# Altium PCB CompuertasNOT_Pcb.PcbDoc
Units mm, origin at the board's own origin, x right, y up, seen from the top; angles counter-clockwise.
Board outline 35.97 x 36.2 mm, 2 copper layers (Top Layer, Bottom Layer); 14 components, 10 nets, 43 pads, 0 vias.
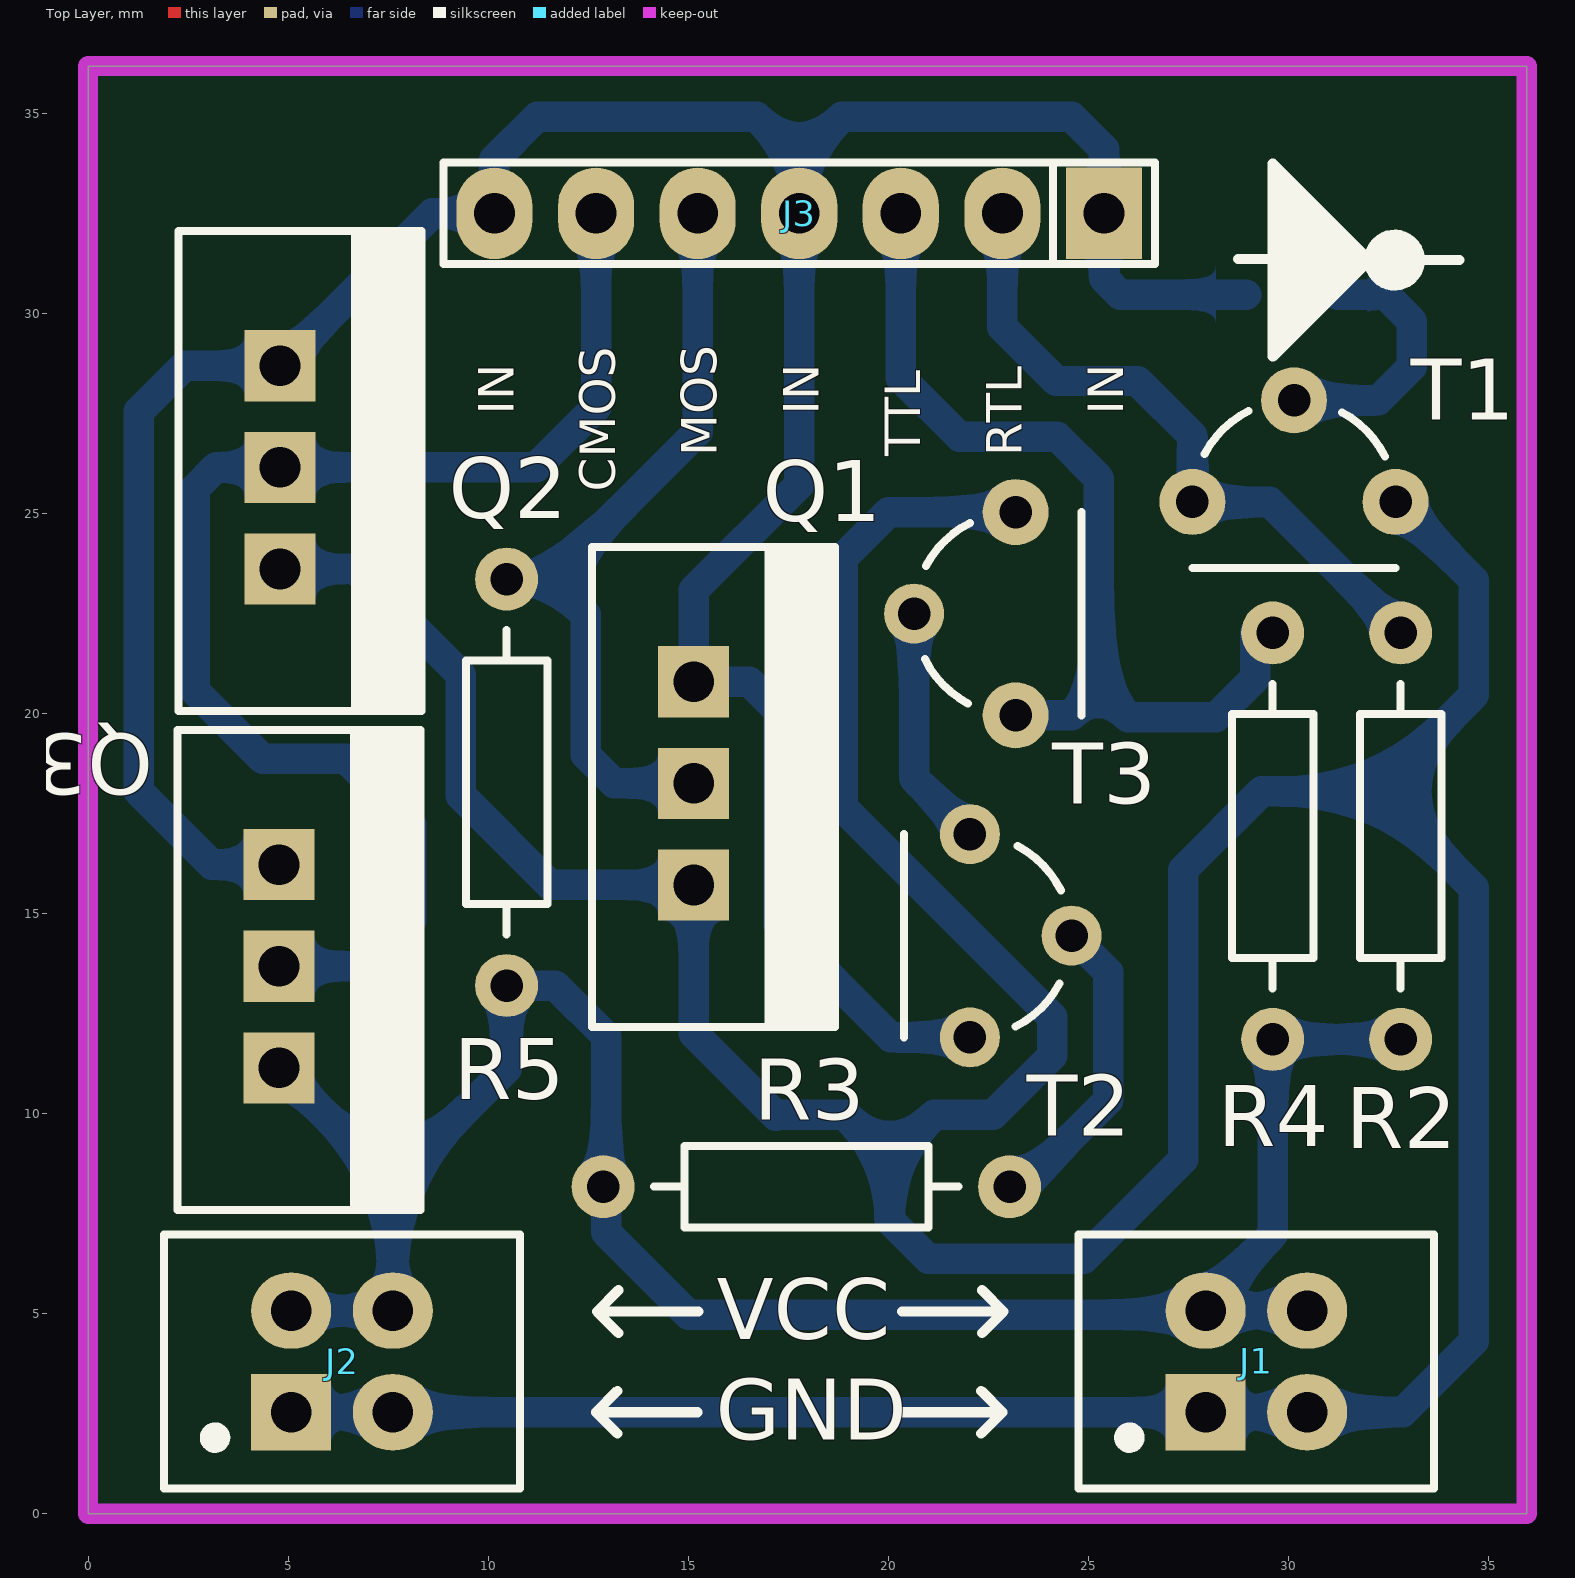
[diagram p0: Top Layer view]
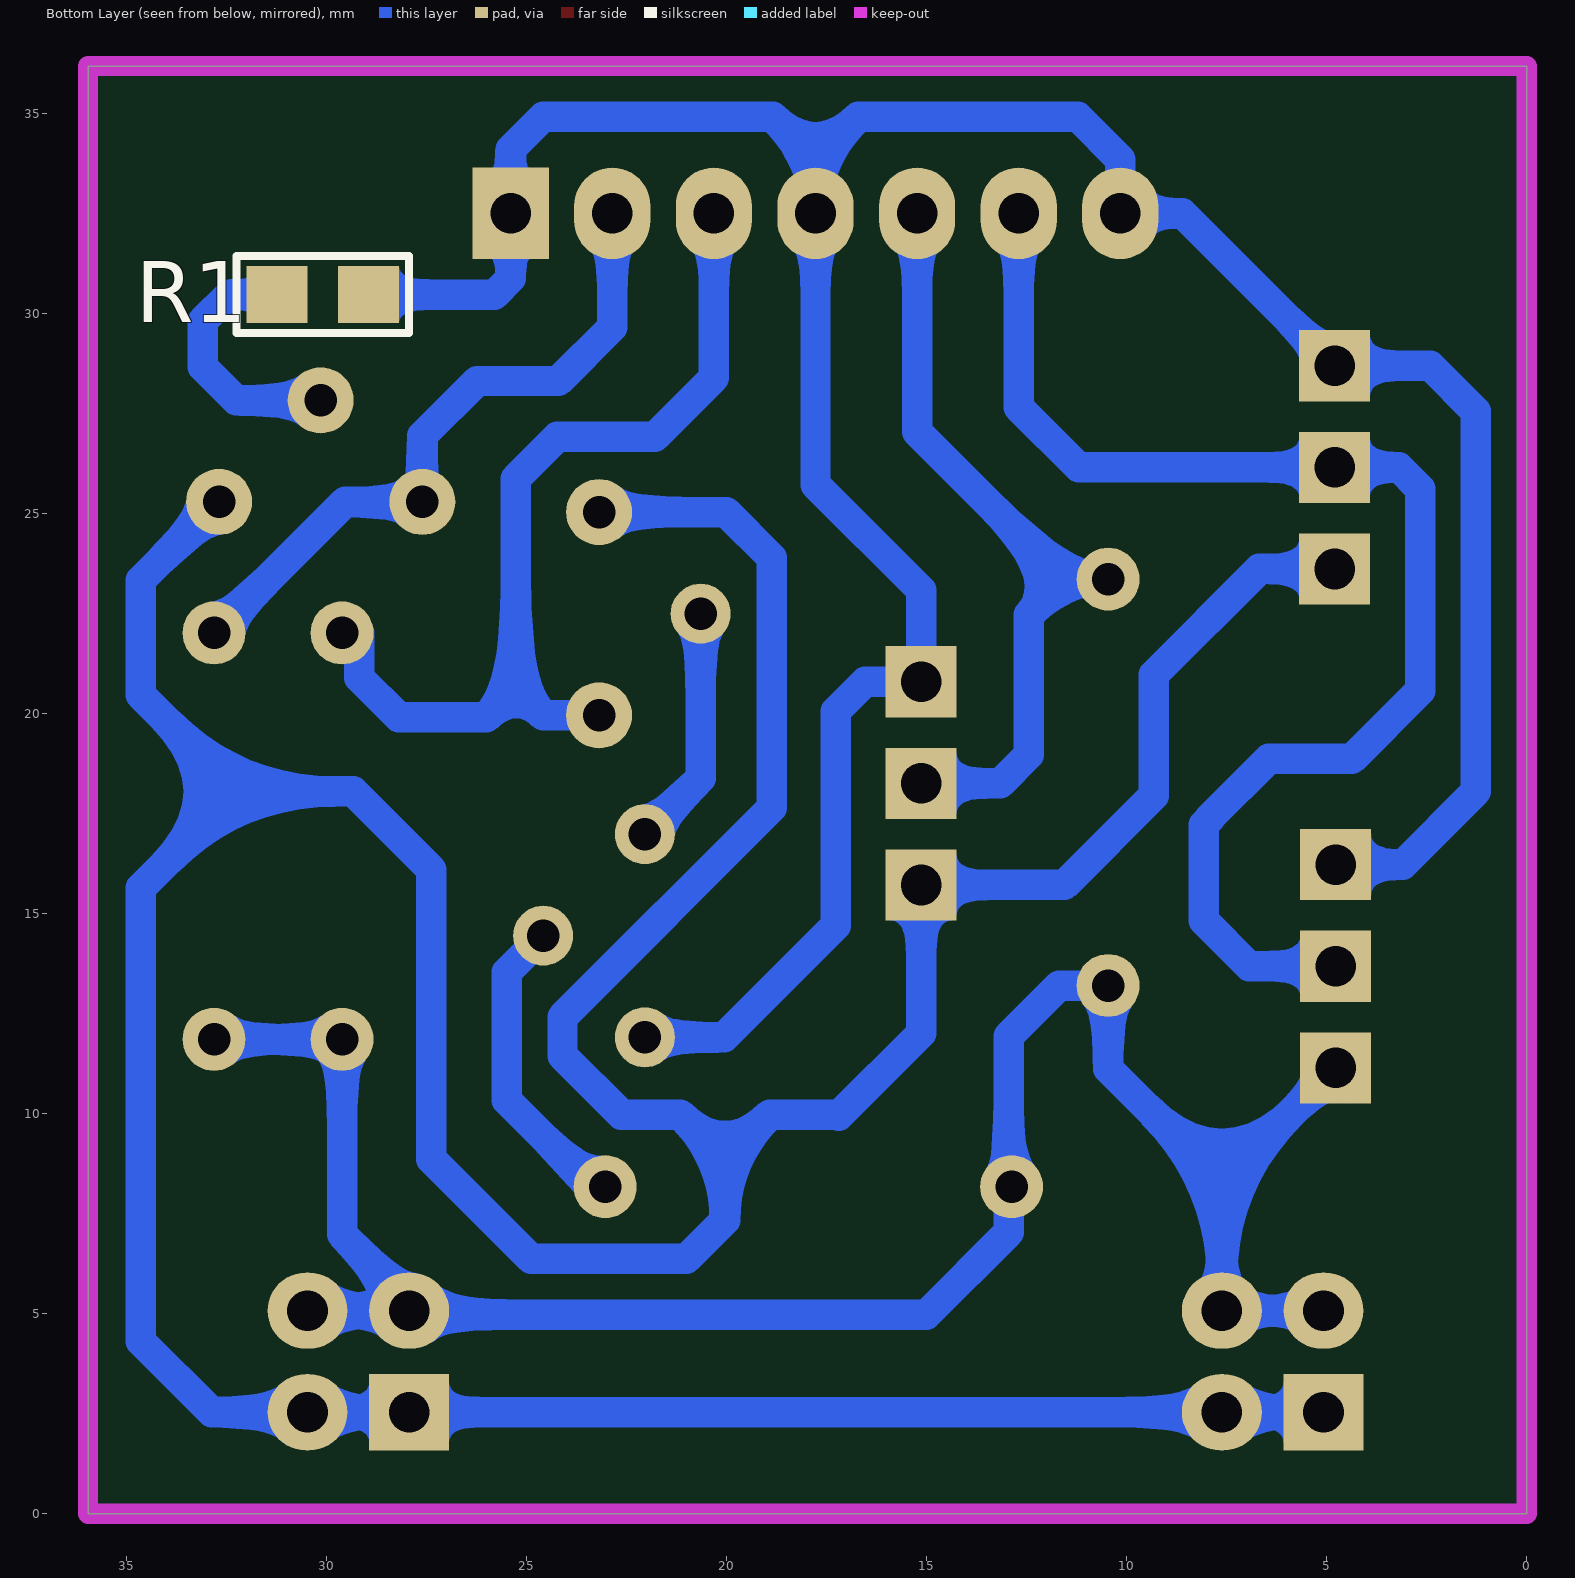
[diagram p1: Bottom Layer view, seen from below]
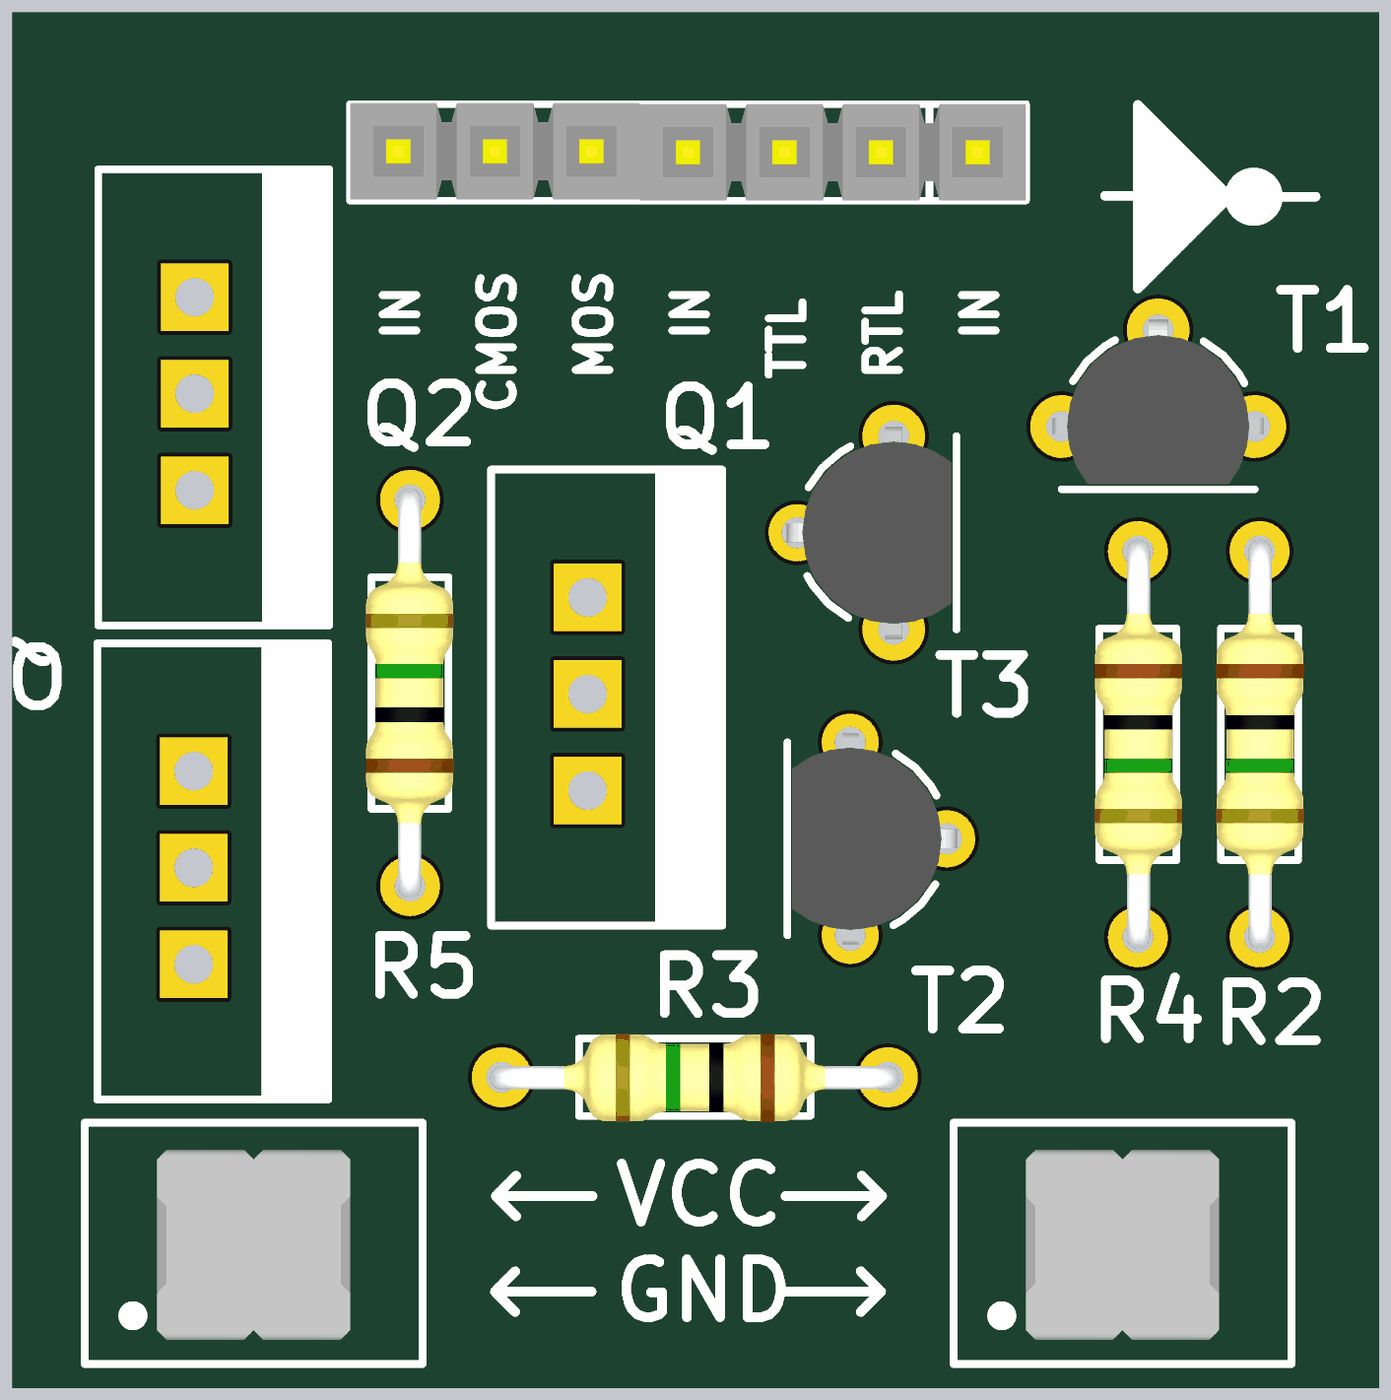
[diagram p2: 3D render of the assembled board from above, using the file's embedded part models]

## Layer stack, top to bottom
Top Solder: solder mask 0.0102, Solder Resist, Dk 3.5
Top Layer: signal copper 0.0356
Dielectric 1: dielectric 0.32, FR-4, Dk 4.8
Bottom Layer: signal copper 0.0356
Bottom Solder: solder mask 0.0102, Solder Resist, Dk 3.5

## Board outline
0,0 0,36.195 35.966,36.195 35.966,0

## Design rules (kind name [scope] priority, off if disabled: settings)
Clearance [All] p1: gap=0.635
PolygonConnect [All] p1: connectstyle=Relief reliefconductorwidth=0.254 reliefentries=4 polygonreliefangle="90 Angle" airgapwidth=0.254
RoutingVias [All] p1: holewidth=0.711 width=1.27 viastyle="Through Hole" minholewidth=0.711 minwidth=1.27 maxholewidth=0.711 maxwidth=1.27
SolderMaskExpansion [All] p1: expansion=0.102
Width [All] p1: maxlimit=0.889 minlimit=0.635 preferedwidth=0.762
30 further rules are at their usual default settings.

## Components (designator, comment, footprint, x,y, rotation, side; value= is the part's Value field where it differs from the comment)
J1 "Supply Header" SIP2*2 27.94,2.54 r0 top
J2 "Supply Header" SIP2*2 5.08,2.54 r0 top
J3 "CON7" SIP7 25.4,32.512 r180 top
Q1 "IRFZ44N" "TO-220 V" 15.138,18.263 r270 top
Q2 "IRFZ44N" "TO-220 V" 4.801,26.162 r270 top
Q3 "IRF9530" "TO-220 V" 4.775,13.691 r270 top
R1 "470k" 0805 30.099,30.48 r180 bottom
R2 "10k" RES400 32.817,22.022 r270 top
R3 "470k" RES400 23.038,8.179 r180 top
R4 "10k" RES400 29.616,22.022 r270 top
R5 "10k" RES400 10.465,13.208 r90 top
T1 "BC547" TO92#1 30.15,26.568 r180 top
T2 "BC547" TO92#2 23.317,14.453 r90 top
T3 "BC547" TO92#3 21.92,22.504 r270 top

## Footprints (in the part's own frame and the unit in brackets; to place one, negate y for a bottom-side part, rotate by r counter-clockwise, add the part's x,y. Pads: shape width x height; smd on the part's side, far side on the other; paste and mask are expansions set on the pad)
0805 [mil] "Pasivo 0805"
  rect 60x56 smd: 1(-45,0) 2(45,0)
  silkscreen extent -85,-38 85,38, body extent -39,-25 39,25, height 15
RES400 [mil]
  round 62 hole 32: 1(0,0) 2(400,0)
  silkscreen extent 50,-40 350,40, body extent -12,-45 412,46, height 96
SIP2*2 [mm]
  rect 2x1.905 hole 1.016: 1(0,0)
  oval 2x1.905 hole 1.016: 2(0,2.54) 3(2.54,0) 4(2.54,2.54)
  silkscreen extent -3.17,-1.91 5.71,4.44, body extent -1.27,-1.27 3.81,3.73, height 8.8
SIP7 [mil]
  rect 75x90 hole 40: 1(0,0)
  oval 75x90 hole 40: 2(100,0) 3(200,0) 4(300,0) 5(400,0) 6(500,0) 7(600,0)
  silkscreen extent -50,-50 650,50, body extent -50,-51 650,50, height 330
TO92#1 [mm]
  round 1.65 hole 0.813: 1(0,-1.27) 2(2.54,1.27) 3(-2.54,1.27)
  silkscreen extent -2.54,-1 2.54,2.92, body extent -2.79,-1.55 2.79,2.79, height 8
TO92#2 [mm]
  round 1.5 hole 0.813: 1(0,-1.27) 2(2.54,1.27) 3(-2.54,1.27)
  silkscreen extent -2.54,-1 2.54,2.92, body extent -2.79,-1.55 2.79,2.79, height 8
TO92#3 [mm]
  round 1.5 hole 0.813: 1(0,-1.27)
  round 1.65 hole 0.813: 2(2.54,1.27) 3(-2.54,1.27)
  silkscreen extent -2.54,-1 2.54,2.92, body extent -2.79,-1.55 2.79,2.79, height 8
"TO-220 V" [mil]
  rect 70x70 hole 40: 1(-100,0) 2(0,0) 3(100,0)
  silkscreen extent -232,-100 240,139, body extent -197,-79 197,118, height 709

## Part data
J1 J2: library part CON2*2
Q1 Q2: library part "MOSFET N"
Q3: library part "MOSFET P"
R1 R2 R3 R4 R5: library part RES
T1 T2 T3: library part "TRANSISTOR NPN"

## Nets (pads, with @x,y where several pads share a name; then routed paths per layer and width w, separated by ;. In a path a pad name is that pad's centre, name@x,y a point inside that pad or via, vN(x,y) a via of type N, cw(c..) or ccw(c..) an arc to the next point about the centre after c; other vN are vias at no path point)
CMOS_OUT: J3.6 Q2.2 Q3.2 | length 33.8
  Bottom Layer w0.762: Q3.2 6.934,13.691 8.077,14.834 8.077,17.227 7.925,17.379 7.925,17.399 6.452,18.872 4.369,18.872 2.667,20.574 2.667,25.629 3.2,26.162 Q2.2 11.201,26.162 12.7,27.661 J3.6
GND: J1.1 J1.3 J2.1 J2.3 Q1.3 Q2.3 T1.3 T3.3 | length 127.1
  Bottom Layer w0.762: Q2.3 6.68,23.622 9.322,20.98 9.322,17.958 11.557,15.723 Q1.3 15.138,12.014 17.196,9.957 17.221,9.982 18.923,9.982 20.041,8.865 ; J2.1 J2.3 J1.1 J1.3 32.868,2.54 34.646,4.318 34.646,15.646 32.233,18.059 ; T3.3 20.015,25.044 18.872,23.901 18.872,17.653 24.105,12.421 24.105,11.456 22.631,9.982 21.158,9.982 20.041,8.865 ; T1.3 34.646,23.343 34.646,20.472 32.233,18.059 ; 20.041,8.865 20.041,7.341 21.006,6.375 24.892,6.375 27.381,8.865 27.381,16.104 29.337,18.059 32.233,18.059
IN: J3.1 J3.4 J3.7 Q1.1 Q2.1 Q3.1 R1.2 T2.3 | length 77.8
  Bottom Layer w0.762: Q3.1 3.099,16.231 1.27,18.059 1.27,27.559 2.413,28.702 Q2.1 8.611,32.512 J3.7 10.16,33.858 11.227,34.925 16.713,34.925 17.78,33.858 ; T2.3 20.066,11.913 17.272,14.707 17.272,20.066 16.535,20.803 Q1.1 15.138,23.089 17.78,25.73 J3.4 17.78,33.858 ; R1.2 25.806,30.48 25.4,30.886 J3.1 25.4,34.112 24.587,34.925 18.847,34.925 17.78,33.858
MOS_OUT: J3.5 Q1.2 R5.2 | length 19.5
  Bottom Layer w0.762: R5.2 11.557,23.368 ; Q1.2 13.157,18.263 12.446,18.974 12.446,22.479 11.557,23.368 ; J3.5 15.24,27.051 11.557,23.368
NetR1_1: R1.1 T1.1 | length 6.6
  Bottom Layer w0.762: T1.1 32.258,27.838 33.096,28.677 33.096,29.82 32.436,30.48 R1.1
NetR3_1: R3.1 T2.1 | length 7.4
  Bottom Layer w0.762: R3.1@23.47,8.306 25.502,10.338 25.502,13.538 T2.1
NetT2_2: T2.2 T3.1 | length 6.1
  Bottom Layer w0.762: T3.1 20.65,18.39 T2.2
RTL_OUT: J3.2 R2.1 T1.2 | length 16.9
  Bottom Layer w0.762: J3.2 22.86,29.667 24.206,28.321 26.238,28.321 27.61,26.949 T1.2 29.54,25.298 R2.1
TTL_OUT: J3.3 R4.1 T3.2 | length 23.5
  Bottom Layer w0.762: J3.3 20.32,28.397 21.793,26.924 24.232,26.924 25.273,25.883 25.273,20.65 ; T3.2 24.587,19.964 25.273,20.65 ; R4.1@29.185,22.022 29.185,20.904 28.194,19.914 26.01,19.914 25.273,20.65
VCC: J1.2 J1.4 J2.2 J2.4 Q3.3 R2.2 R3.2 R4.2 R5.1 | length 53.1
  Bottom Layer w0.762: Q3.3@4.75,11.379 4.75,11.151 7.62,8.28 ; J2.2 J2.4 7.62,8.28 ; J1.4 J1.2 ; R2.2 R4.2 29.616,6.985 27.991,5.359 27.991,5.131 J1.2 ; 7.62,8.28 10.465,11.125 R5.1 11.684,13.208 12.954,11.938 12.954,7.036 15.011,4.978 27.838,4.978 J1.2

## Keep-outs
Keep-Out Layer:
  the board outline again, w0.508

## Silkscreen, mask and mechanical layers (free items; w line width, h text height)
Top Overlay:
  circle w0.254: c32.664,31.344 r0.381
  circle w0.254: c32.664,31.344 r0.254
  circle w0.254: c32.664,31.344 r0.457
  circle w0.254: c32.664,31.344 r0.635
  circle w0.254: c32.664,31.344 r0.127
  region: 29.616,28.931 32.029,31.344 29.616,33.757
  lines w0.254: 12.776,2.54 12.7,2.54 ; 12.802,5.055 12.725,5.055 ; 13.233,2.007 12.7,2.54 ; 13.259,4.521 12.725,5.055 ; 15.24,2.54 12.7,2.54 ; 15.265,5.055 12.725,5.055 ; 20.32,2.54 22.86,2.54 ; 20.345,5.055 22.885,5.055 ; 22.327,2.007 22.86,2.54 ; 22.327,3.073 22.86,2.54 ; 22.352,4.521 22.885,5.055 ; 22.352,5.588 22.885,5.055 ; 28.753,31.369 29.616,31.369 ; 32.791,31.344 34.29,31.344 ; 12.7,2.54 13.233,3.073 12.7,2.54 ; 12.725,5.055 13.259,5.588 12.725,5.055 ; 29.616,28.931 32.029,31.344 29.616,33.757 29.616,33.249 29.616,28.931
  text "IN" at 10.643,27.48 h0.89 r90
  text "IN" at 18.263,27.48 h0.89 r90
  text "IN" at 25.883,27.48 h0.89 r90
  text "MOS" at 15.723,26.444 h0.89 r90
  text "TTL" at 20.803,26.444 h0.89 r90
  text "RTL" at 23.343,26.444 h0.89 r90
  text "CMOS" at 13.183,25.555 h0.89 r90
  text "VCC" at 15.723,4.369 h1.52
  text "GND" at 15.697,1.854 h1.52